# Altium PCB SensorBoard.PcbDoc
Units mm, origin at the board's own origin, x right, y up, seen from the top; angles counter-clockwise.
Board outline 47.5 x 43.56 mm, 2 copper layers (Top Layer, Bottom Layer); 1 components, 3 nets, 15 pads, 0 vias.
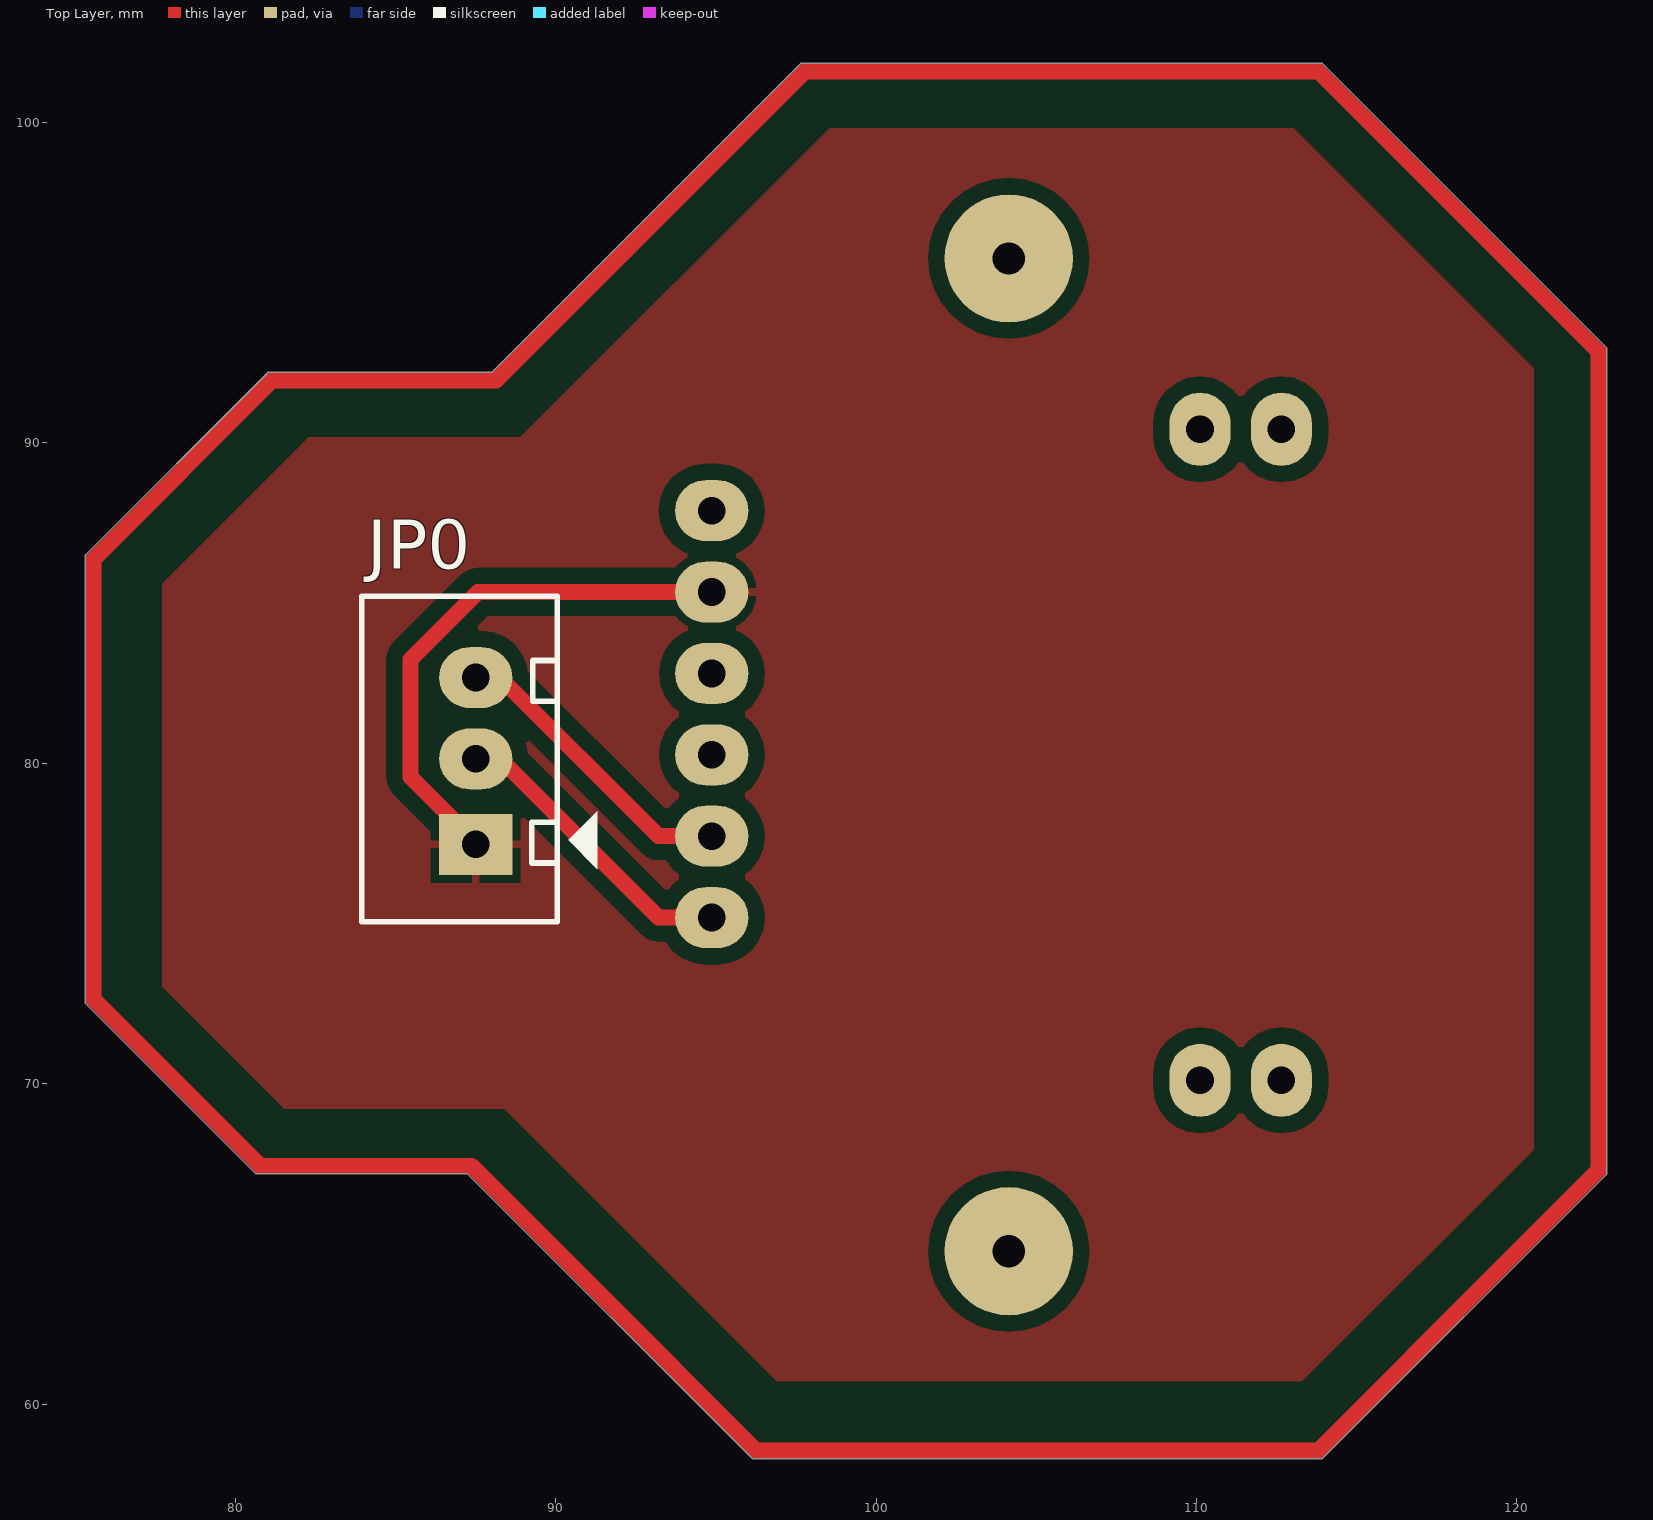
[diagram p0: Top Layer view]
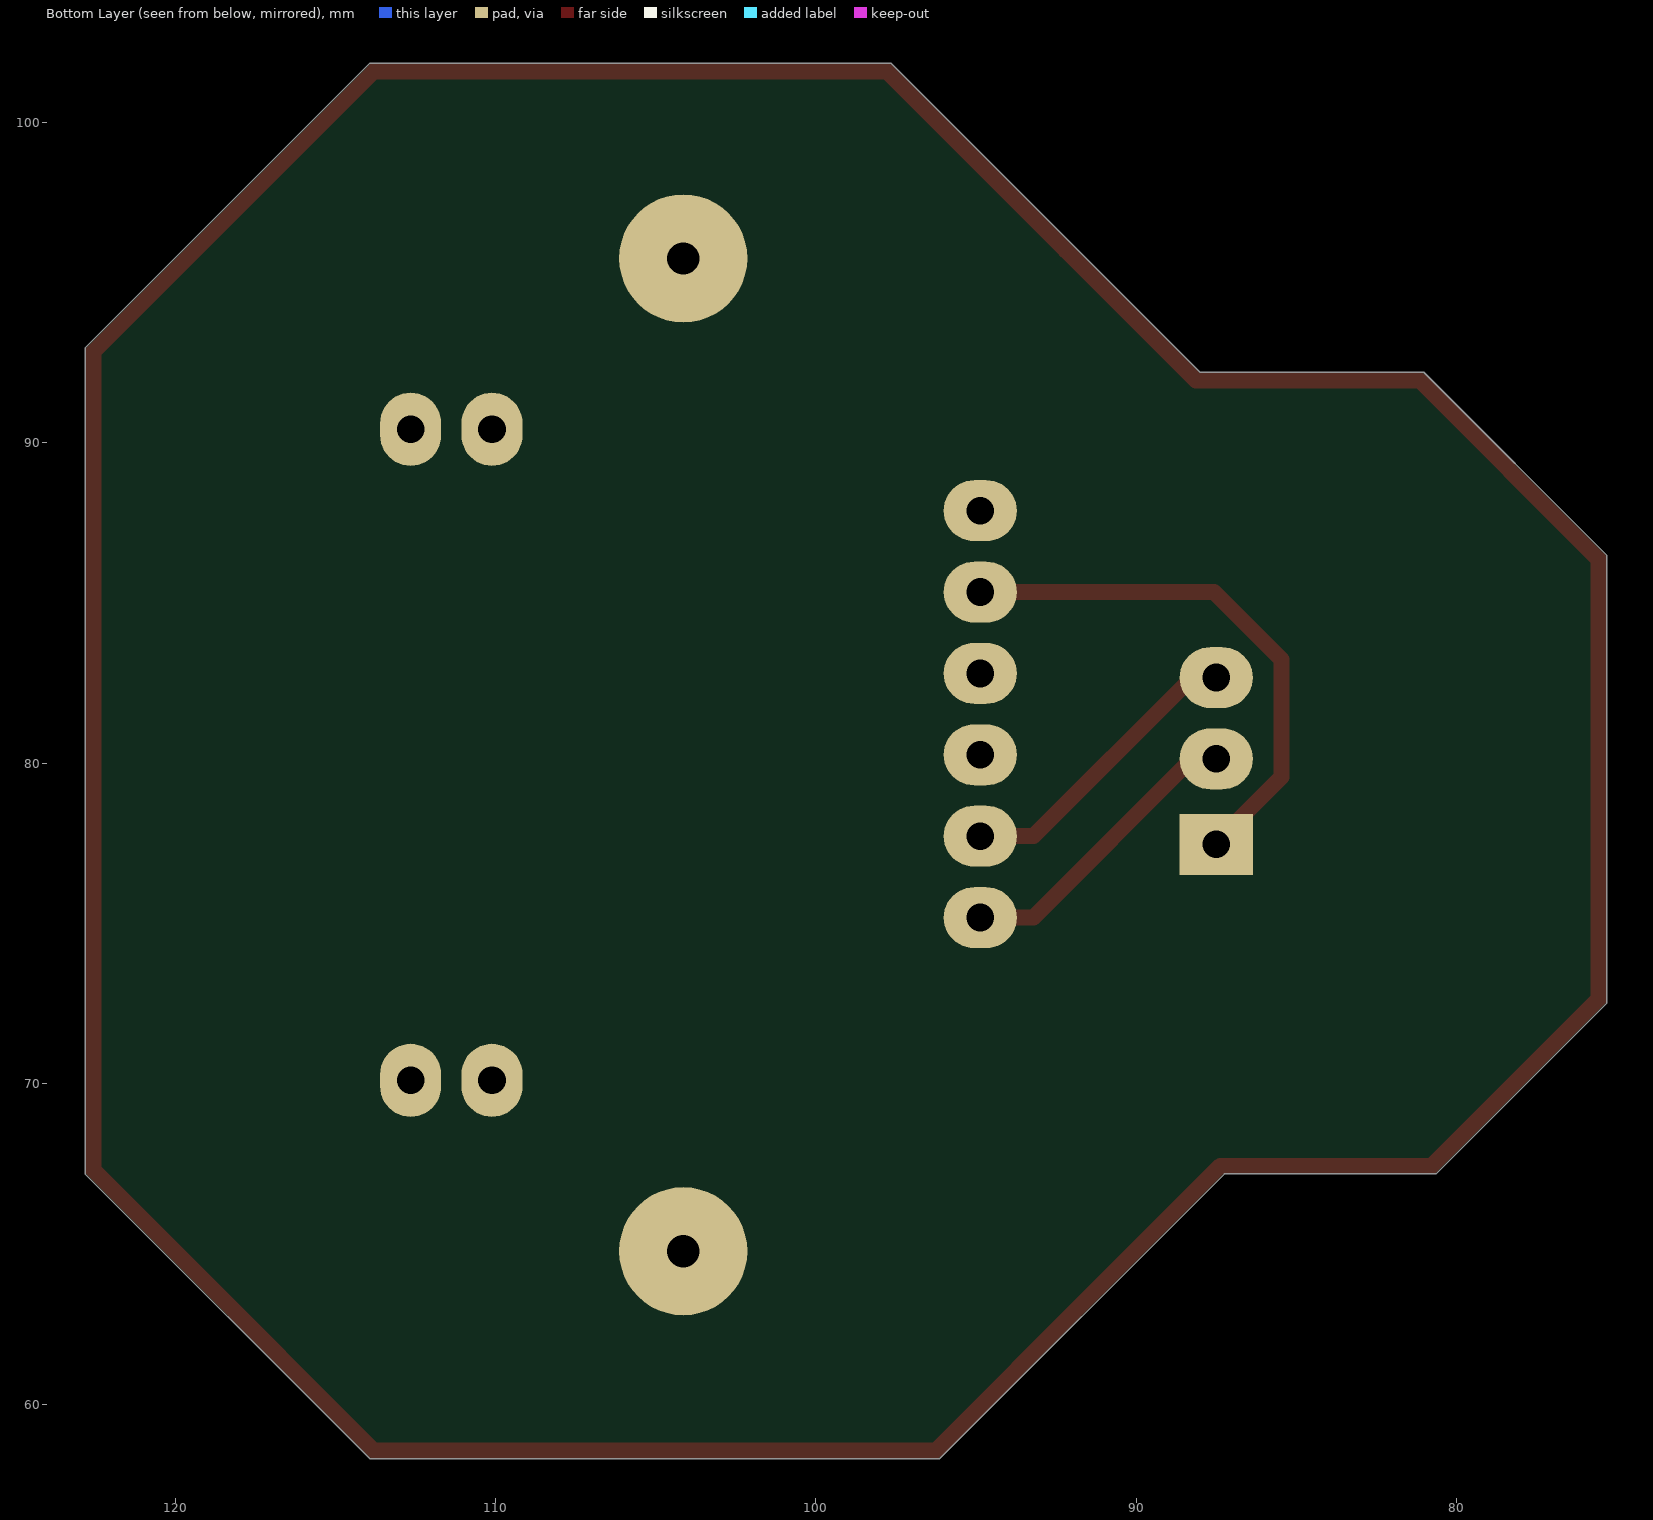
[diagram p1: Bottom Layer view, seen from below]

## Layer stack, top to bottom
Top Solder: solder mask 0.0102, Solder Resist, Dk 3.5
Top Layer: signal copper 0.0356
Dielectric 1: dielectric 0.32, FR-4, Dk 4.8
Bottom Layer: signal copper 0.0356
Bottom Solder: solder mask 0.0102, Solder Resist, Dk 3.5

## Board outline
81.026,92.202 88.011,92.202 97.663,101.854 113.919,101.854 122.809,92.964 122.809,67.183 113.919,58.293 96.139,58.293 87.249,67.183 80.645,67.183 75.311,72.517 75.311,86.487

## Design rules (kind name [scope] priority, off if disabled: settings)
Clearance [All] p1: gap=0.5
DiffPairsRouting [All] p1: maxlimit=0.5 minlimit=0.5 mostfreqgap=0.5 toplayer_minwidth=0.5 toplayer_maxwidth=0.5 toplayer_prefwidth=0.5 bottomlayer_minwidth=0.5 bottomlayer_maxwidth=0.5 bottomlayer_prefwidth=0.5 maxuncoupledlength=12.7
PolygonConnect [All] p1: connectstyle=Relief reliefconductorwidth=0.254 reliefentries=4 polygonreliefangle="90 Angle" airgapwidth=0.254
RoutingLayers [All] p1: top layer_v5=TRUE bottom layer_v5=FALSE
RoutingVias [All] p1: holewidth=0.711 width=1.27 viastyle="Through Hole" minholewidth=0.711 minwidth=1.27 maxholewidth=0.711 maxwidth=1.27
SolderMaskExpansion [All] p1: expansion=0.102
Width [All] p1: maxlimit=0.5 minlimit=0.5 preferedwidth=0.5
28 further rules are at their usual default settings.

## Components (designator, comment, footprint, x,y, rotation, side; value= is the part's Value field where it differs from the comment)
JP0 "SENSOR" CON3 87.503,77.597 r90 top locked

## Footprints (in the part's own frame and the unit in brackets; to place one, negate y for a bottom-side part, rotate by r counter-clockwise, add the part's x,y. Pads: shape width x height; smd on the part's side, far side on the other; paste and mask are expansions set on the pad)
CON3 [mil] "CON 3"
  rect 75x90 hole 34: ""(-5,0)
  oval 75x90 hole 34: ""(100,0) ""(200,0)
  silkscreen extent -100,-150 300,140, body extent -95,-90 295,136, height 276

## Part data
JP0: library part Con3, "Connector 3"

## Free pads (board coordinates)
  oval 1.905x2.286 hole 0.864: FIX(110.109,70.104) FIX(110.109,90.424) FIX(112.649,70.104) FIX(112.649,90.424)
  oval 2.286x1.905 hole 0.864: ID(94.869,80.264) SIG2(94.869,87.884) VRES(94.869,82.804) ""(94.869,75.184) ""(94.869,77.724) ""(94.869,85.344)
  round 4 hole 1: SCR(104.14,64.77) SCR(104.14,95.758)

## Nets (pads, with @x,y where several pads share a name; then routed paths per layer and width w, separated by ;. In a path a pad name is that pad's centre, name@x,y a point inside that pad or via, vN(x,y) a via of type N, cw(c..) or ccw(c..) an arc to the next point about the centre after c; other vN are vias at no path point)
5V: JP0.@87.503,82.677 pad.@94.869,77.724 | length 9.4
  Top Layer w0.5: JP0.@87.503,82.677 88.26,82.677 93.213,77.724 pad.@94.869,77.724
GND: JP0.@87.503,77.47 pad.@94.869,85.344 | length 18.6
  Top Layer w0.5: JP0.@87.503,77.47 87.503,77.978 88.011,77.47 87.572,77.47 85.471,79.571 85.471,83.243 87.572,85.344 pad.@94.869,85.344
SIG: JP0.@87.503,80.137 pad.@94.869,75.184 | length 9.4
  Top Layer w0.5: JP0.@87.503,80.137 88.26,80.137 93.213,75.184 pad.@94.869,75.184
copper on no net: | length 152.6
  Top Layer w0.5: 75.565,72.644 80.772,67.437 87.376,67.437 91.186,63.627 96.266,58.547 106.426,58.547 113.792,58.547 119.634,64.389 122.555,67.31 122.555,92.837 113.792,101.6 97.79,101.6 92.202,96.012 88.138,91.948 82.423,91.948 81.153,91.948 75.565,86.36 75.565,72.644

## Polygon pours and split planes (outlines as drawn)
GND on Top Layer "TOP" (solid, pour order 2): 120.523,67.945 113.284,60.706 96.901,60.706 93.98,63.627 88.392,69.215 81.534,69.215 77.724,73.025 77.724,73.152 77.724,85.598 81.534,89.408 82.296,90.17 88.9,90.17 98.552,99.822 113.03,99.822 120.523,92.329